# Altium PCB uku20710_proc.PcbDoc (part 3 of 3)
Units mm, origin at the board's own origin, x right, y up, seen from the top; angles counter-clockwise.
Board outline 354.7 x 156.7 mm, 4 copper layers (Top Layer, MidLayer1, MidLayer2, Bottom Layer); 286 components, 533 nets, 991 pads, 570 vias.
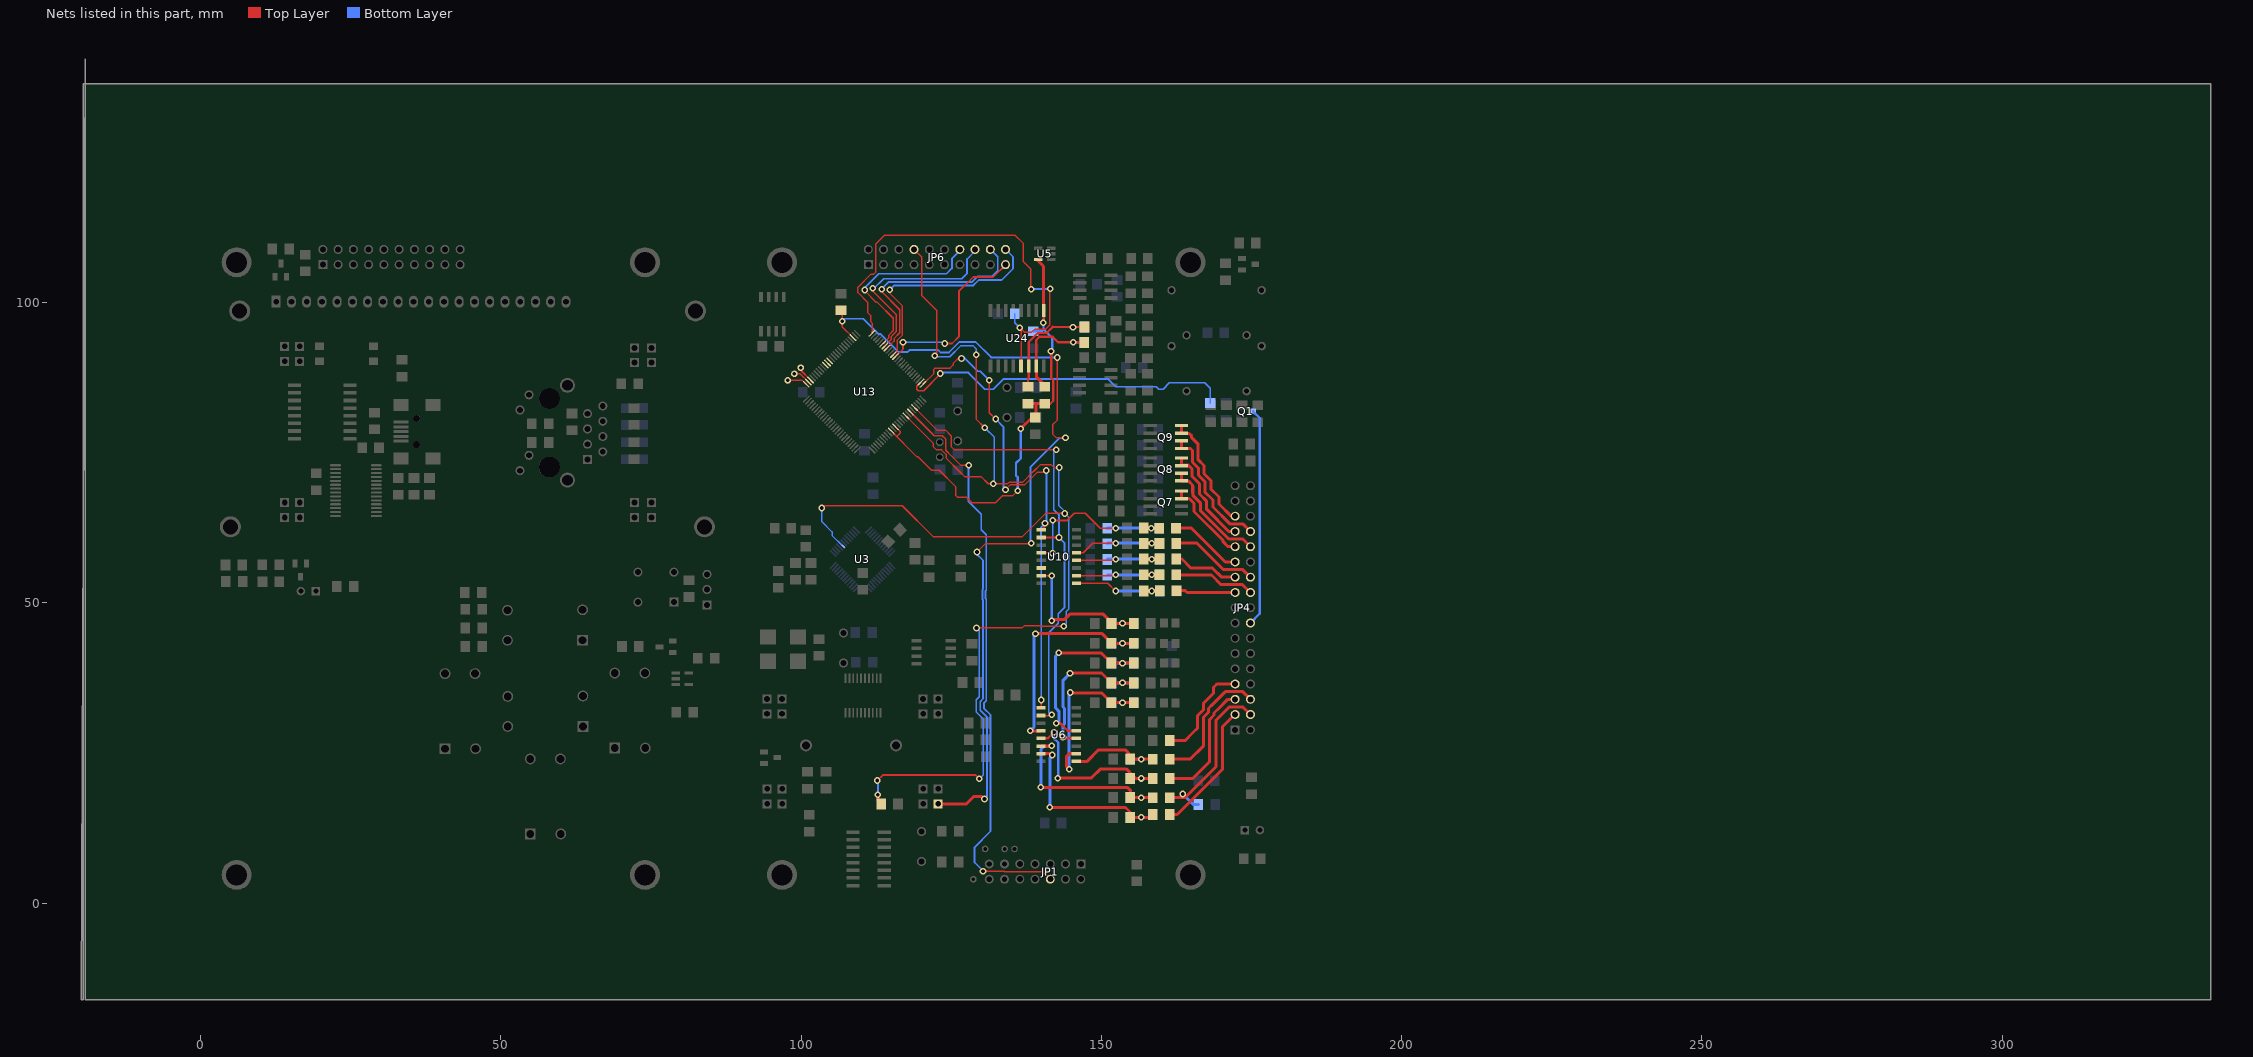
[diagram p3: the nets of this part, all layers, seen from the top]

## Via types
v1: diameter 1.1, hole 0.6, Top Layer to Bottom Layer, 491 vias
v2: diameter 1.2, hole 0.7, Top Layer to Bottom Layer, 63 vias
v3: diameter 1.5, hole 1, Top Layer to Bottom Layer, 12 vias
v4: diameter 1.27, hole 0.7, Top Layer to Bottom Layer, 3 vias
v5: diameter 1.2, hole 0.6, Top Layer to Bottom Layer, 1 vias

## Nets (pads, with @x,y where several pads share a name; then routed paths per layer and width w, separated by ;. In a path a pad name is that pad's centre, name@x,y a point inside that pad or via, vN(x,y) a via of type N, cw(c..) or ccw(c..) an arc to the next point about the centre after c; other vN are vias at no path point) (continued)
P1_25: JP6.19 U13.39 | length 29.9
  Top Layer w0.3: U13.39@115.701,90.985 116.974,92.258 v1(116.952,93.374) ; v1(123.904,93.173) 125.124,93.173 126.274,94.324 126.274,101.851 128.674,104.251 131.984,104.251 JP6.19@134.034,106.301
  Bottom Layer w0.3: v1(116.952,93.374) 123.704,93.374 v1(123.904,93.173)
P1_26: JP6.20 U13.40 | length 38
  Top Layer w0.25: v1(114.774,102.151) 114.774,101.501 116.874,99.401 116.874,94.601 116.024,93.751 116.024,92.015 U13.40@115.347,91.338
  Bottom Layer w0.3: v1(114.774,102.151) 115.474,102.851 128.674,102.851 129.574,103.751 133.374,103.751 135.274,105.651 135.274,107.601 JP6.20@134.034,108.841
P1_27: JP6.18 U13.43 | length 36.9
  Top Layer w0.25: v1@113.324,101.901 116.424,98.801 116.424,94.951 115.474,94.001 115.474,93.587 U13.43@114.287,92.399 ; U13.43@114.124,92.251 U13.43@114.28,92.406
  Bottom Layer w0.3: v1@113.324,101.901 113.324,102.177 113.324,102.201 113.351,102.228 114.524,103.401 128.424,103.401 129.374,104.351 131.774,104.351 132.724,105.301 132.724,107.611 JP6.18@131.494,108.841
  other v1: 113.403,102.177
P1_28: JP6.16 U13.44 | length 33.2
  Top Layer w0.25: v1@111.874,102.101 111.874,101.951 115.874,97.951 115.874,95.201 115.804,95.131 115.804,95.123 115.002,94.32 115.002,93.821 U13.44@113.933,92.753
  Bottom Layer w0.3: v1@111.874,102.101 112.05,102.277 113.724,103.951 126.724,103.951 127.624,104.851 127.624,107.251 128.954,108.581 JP6.16@128.954,108.841
  other v1: 111.951,102.376
P1_29: 
P1_29: 
P1_29: 
P1_29: 
P1_29: JP6.14 U13.45 | length 31.9
  Top Layer w0.25: v1@110.3,102.376 110.3,102.226 110.526,102.001 112.501,100.025 112.701,100.025 115.352,97.375 115.352,95.324 114.552,94.524 114.552,94.078 U13.45@113.58,93.106
  Bottom Layer w0.3: v1@110.501,102.376 112.901,104.776 124.204,104.776 125.104,105.677 125.104,107.277 126.414,108.587 JP6.14@126.414,108.841
  other v1: 110.601,102.076
P1_30: U6.10 U10.10 U13.21 | length 78.8
  Top Layer w0.25: U13.21@118.883,82.5 122.631,78.751 124.024,78.751 124.974,77.801 124.974,76.001 125.474,75.501 v1(142.474,75.501) ; U6.10@139.954,31.219 139.972,31.201 141.702,31.201 v1@141.76,31.259
  Top Layer w0.3: U10.10@139.999,60.876 v1@142.95,60.876
  Bottom Layer w0.3: v1@141.76,31.259 141.224,31.794 141.224,44.977 142.81,46.563 142.81,48.199 143.874,49.263 143.874,59.902 v1@142.96,60.816 ; v1(142.474,75.501) 142.074,75.101 142.074,65.503 142.924,64.653 v1@142.924,60.816
  other v1: 141.76,31.359 142.935,60.876
P1_31: R22.1 U13.20 | length 108.1
  Top Layer w0.25: U13.20@118.529,82.146 122.405,78.271 123.755,78.271 124.505,77.521 124.505,75.77 125.557,74.719 127.832,74.719 v1(128.032,74.519)
  Top Layer w0.3: R22.1@104.133,19.043 109.666,19.043 112.578,21.956 131.883,21.956 133.457,20.382 v1(135.934,20.382) ; v1(131.357,32.909) 133.358,30.909 v1(136.508,30.909)
  Bottom Layer w0.3: v1(128.032,74.519) 128.882,73.669 128.882,72.444 128.406,71.968 128.406,67.218 130.657,64.967 130.657,62.517 131.357,61.817 131.357,51.964 131.157,51.764 131.157,50.914 131.357,50.714 v1(131.357,32.909) ; v1(135.934,20.382) 136.558,21.006 136.558,22.707 135.958,23.307 135.958,30.359 v1(136.508,30.909)
P1_31: 
P1_31: 
P1_31: 
P1_31: 
P1_31: 
P1_31: 
P1_31: 
P1_31: 
P1_31: 
P1_31: 
P1_31: 
P1_31: 
P1_31: 
P2_0: U13.75 X13.1 | length 3.3
  Top Layer w0.25: X13.1@97.772,87.022 100.218,87.022 U13.75@100.852,86.389
P2_1: U13.74 X14.1 | length 2.9
  Top Layer w0.25: X14.1@98.872,88.122 99.825,88.122 U13.74@101.205,86.742
P2_2: U13.73 X15.1 | length 2.7
  Top Layer w0.25: X15.1@99.925,89.151 99.925,88.729 U13.73@101.559,87.096
P2_7: U13.66
P2_8: U13.65
P2_9: U13.64
P2_10: R9.2 U13.53 X20.1 | length 142.3
  Top Layer w0.25: R9.2@106.7,98.725 106.874,98.55 v1(106.874,96.901) 106.824,96.851 106.824,95.972 U13.53@108.63,94.167 ; v1(129.274,58.451) 130.624,59.801 v1@138.274,59.801 ; v1(142.674,90.851) 142.674,80.451 141.874,79.651 141.874,78.101 142.524,77.451 v1(144.024,77.451)
  Top Layer w0.5: X20.1@122.822,16.501 127.502,16.501 128.706,17.706 130.107,17.706 v2(130.507,17.305)
  Bottom Layer w0.3: v1(106.874,96.901) 107.274,97.301 110.324,97.301 112.851,94.774 113.201,94.774 116.202,91.773 117.752,91.773 118.052,92.073 122.804,92.073 123.204,91.673 124.604,91.673 126.355,93.424 129.055,93.424 131.628,90.851 v1(142.674,90.851) ; v1(129.274,58.451) 129.274,58.051 130.274,57.051 130.274,52.239 130.197,52.162 130.197,50.516 130.274,50.439 130.274,34.001 129.824,33.551 129.824,32.101 130.924,31.001 130.924,17.723 v2(130.507,17.305) ; v1@138.274,59.801 138.174,59.901 138.174,72.551 143.074,77.451 v1(144.024,77.451)
  other v1: 138.309,59.916
P2_13: R97.1 U13.50 U24.5 | length 74.9
  Top Layer w0.25: U13.50@111.812,94.874 111.812,96.566 111.552,96.825 111.552,97.848 111.124,98.276 111.124,99.977 109.452,101.649 109.452,102.551 111.628,104.727 112.102,104.727 112.452,105.078 112.452,109.779 113.853,111.179 135.658,111.179 137.008,109.829 137.008,106.778 138.259,105.528 v1@138.259,102.277 ; v1(136.408,95.825) v1@136.609,95.624 ; U24.5@136.609,89.426 v1@136.609,95.624 ; v1(141.46,102.277) 141.36,102.177 141.36,96.225 140.659,95.525 138.859,95.525 138.409,95.075 137.159,95.075 v1@136.609,95.624
  Bottom Layer w0.3: R97.1@135.57,98.119 135.57,96.663 v1(136.408,95.825) ; v1(138.309,102.227) v1@141.41,102.227
P3_25: R84.1 U13.27 | length 57.5
  Top Layer w0.25: U13.27@119.944,86.742 119.254,86.053 119.254,85.573 119.504,85.323 120.404,85.323 123.155,88.073 v1(123.155,88.173)
  Bottom Layer w0.3: v1(123.155,88.173) 123.305,88.323 127.856,88.323 130.607,85.573 132.007,85.573 133.708,87.273 151.062,87.273 152.362,85.973 159.164,85.973 159.564,85.573 160.264,85.573 161.315,86.623 167.216,86.623 168.113,85.726 R84.1@168.113,83.269
P3_26: U6.9 U10.9 U13.26 | length 84.3
  Top Layer w0.25: U13.26@120.297,86.389 122.103,88.195 122.103,88.922 122.253,89.072 124.804,89.072 125.304,89.573 125.304,89.823 126.355,90.873 126.705,90.873 v1@126.905,90.873 ; v1(131.324,87.051) 131.324,81.651 v1(132.374,80.601) ; v1@133.89,68.851 v1(134.024,68.851) 134.791,69.618 137.185,69.618 139.335,71.768 v1@140.835,71.768 ; U6.9@139.954,32.489 139.954,33.481 v1@139.974,33.501 ; U10.9@139.999,62.146 140.609,62.756 v1(140.609,63.217)
  Bottom Layer w0.3: v1@126.905,90.873 127.053,90.873 129.374,88.551 129.824,88.551 v1(131.324,87.051) ; v1(132.374,80.601) 133.674,79.301 133.674,69.051 133.949,68.776 v1@134.074,68.651 ; 139.959,61.317 139.959,62.567 140.835,63.443 v1@140.835,71.768 ; v1@139.974,33.501 139.974,33.81 139.974,61.901
  other v1: 140.009,33.81 140.835,72.018 126.705,90.673
PB1: 
PB1: 
PB2: 
PB2: 
PB3: 
PB3: 
PE6: 
PE6: 
PE7: 
PQ3: 
PQ4: 
PQ5: 
PQ6: 
PROG0: 
PROG1: 
PROG1: 
PROG1: 
PWM1: 
PWM2: 
REL1: JP4.24 Q7.5 Q7.6 | length 17.1
  Top Layer w0.5: Q7.6@163.336,66.071 Q7.5@163.336,64.801 163.336,64.789 Q7.5@164.236,64.789 ; Q7.5@163.824,64.901 163.824,64.851 164.624,64.851 169.374,60.101 169.374,59.251 170.574,58.051 173.554,58.051 JP4.24@174.814,56.791
REL1: 
REL2: JP4.25 Q7.7 Q7.8 | length 14.4
  Top Layer w0.5: Q7.8@163.336,68.611 Q7.7@163.336,67.341 163.348,67.351 164.624,67.351 165.424,66.551 165.424,65.201 170.274,60.351 170.274,60.151 171.094,59.331 JP4.25@172.274,59.331
REL3: JP4.26 Q8.5 Q8.6 | length 20.1
  Top Layer w0.5: Q8.6@163.324,71.566 Q8.5@163.324,70.296 163.327,70.299 163.374,70.251 164.524,70.251 165.174,69.601 165.174,68.301 ; 165.224,69.401 165.224,67.901 166.474,66.651 166.474,65.351 171.224,60.601 173.544,60.601 JP4.26@174.814,59.331
REL4: JP4.27 Q8.7 Q8.8 | length 17.3
  Top Layer w0.5: Q8.8@163.324,74.106 Q8.7@163.324,72.836 163.389,72.901 164.474,72.901 165.074,72.301 165.074,71.051 166.324,69.801 166.324,68.101 167.524,66.901 167.524,65.551 171.204,61.871 JP4.27@172.274,61.871
REL5: JP4.28 Q9.5 Q9.6 | length 22
  Top Layer w0.5: Q9.5@163.324,75.696 Q9.5@163.324,75.701 ; Q9.6@163.324,76.966 Q9.5@163.324,75.701 ; JP4.28@174.814,61.871 173.534,63.151 171.374,63.151 168.574,65.951 168.574,67.101 167.224,68.451 167.224,70.201 166.174,71.251 166.174,72.401 165.174,73.401 165.174,75.351 164.824,75.701 Q9.5@163.324,75.701
REL6: JP4.29 Q9.7 Q9.8 | length 20
  Top Layer w0.5: Q9.8@163.324,79.506 Q9.7@163.324,78.236 163.317,78.244 163.274,78.201 163.324,78.201 164.624,78.201 165.024,77.801 165.024,77.501 166.124,76.401 166.124,73.801 167.074,72.851 167.074,71.501 168.224,70.351 168.224,68.951 169.574,67.601 169.574,66.451 171.614,64.411 JP4.29@172.274,64.411
REL7: JP4.16 Q1.3 | length 36.3
  Bottom Layer w0.4: JP4.16@174.814,46.631 176.368,48.185 176.368,80.771 Q1.3@175.268,81.872
RES: D1.1 JP6.8 U3.29 U13.17 | length 225.8
  Top Layer w0.25: v1(103.452,65.787) 103.852,66.187 ; v1@103.814,66.149 116.822,66.149 121.955,61.016 136.84,61.016 140.691,64.867 v1@143.96,64.867 ; U13.17@117.469,81.085 122.024,76.53 122.024,75.951 122.524,75.451 123.374,75.451 124.124,74.701 124.124,74.101 126.337,71.889 127.207,71.019 129.939,71.019 131.14,69.819 v1(131.957,69.819) ; JP6.8@118.794,108.841 120.074,107.561 120.074,101.151 122.574,98.651 v1@122.574,91.251 ; v1(129.124,91.301) 129.124,80.601 v1(130.574,79.151) ; v2(129.207,45.801) v2@129.307,45.801 ; v2@129.318,45.813 130.407,45.813 ; 130.407,45.801 136.774,45.801 137.174,46.201 139.824,46.201 139.974,46.051 v1@143.76,46.051 ; v1@131.774,69.801 134.366,69.801 134.613,70.048 136.856,70.048 138.731,71.922 ; 138.735,71.918 139.834,73.018 141.587,73.018 142.085,72.519 v1(143.01,72.519)
  Top Layer w0.3: v1(112.678,20.405) 113.579,21.305 129.083,21.305 v1(129.683,20.705)
  Top Layer w0.5: v1(112.778,18.055) 112.778,17.068 D1.1@113.334,16.513
  Bottom Layer w0.25: v1(103.452,65.787) 103.452,63.487 105.152,61.787 105.152,61.224 U3.29@106.731,59.646 ; v1(122.253,91.123) 122.404,90.973 124.754,90.973 126.605,92.823 128.605,92.823 129.124,92.304 v1(129.124,91.301) v1@129.074,91.251 ; v2(129.207,45.801) 129.657,45.351 129.657,34.36 129.157,33.86 129.157,31.809 130.307,30.659 130.307,21.805 130.307,21.329 v1(129.683,20.705) ; v1(130.574,79.151) 132.174,77.551 132.174,69.951 v1@132.024,69.801 ; 142.924,66.168 142.924,72.434 v1(143.01,72.519) ; 142.96,66.168 143.924,65.203 v1(143.924,64.867) 144.524,64.267 144.524,48.927 144.11,48.513 144.11,46.413 v1(143.76,46.063)
  Bottom Layer w0.3: v1(112.678,20.405) 112.778,20.305 v1(112.778,18.055)
RX: 
RXCAN: 
SK1: JP4.23 R43.1 | length 12.2
  Top Layer w0.5: R43.1@162.434,62.417 R43.1@162.427,62.423 165.009,62.423 170.641,56.791 JP4.23@172.274,56.791
SK2: JP4.22 R45.1 | length 14.7
  Top Layer w0.5: R45.1@162.465,59.916 165.916,59.916 170.317,55.515 173.551,55.515 JP4.22@174.814,54.251
SK3: JP4.21 R49.1 | length 11
  Top Layer w0.5: R49.1@162.477,57.272 163.409,57.272 164.916,55.765 168.516,55.765 170.03,54.251 JP4.21@172.274,54.251
SK4: JP4.20 R51.1 | length 13.6
  Top Layer w0.5: R51.1@162.465,54.615 168.316,54.615 169.917,53.014 173.511,53.014 JP4.20@174.814,51.711
T3: 
T3: 
TD1: 
TX: 
U2: U10.14
U5: 
U6: 
U7: 
U8: 
UAKB: 
UB1: JP4.3 R25.2 | length 21.9
  Top Layer w0.5: R25.2@161.362,14.747 162.62,14.747 170.124,22.251 170.124,29.301 172.214,31.391 JP4.3@172.274,31.391
UB2: JP4.5 R29.2 | length 20.7
  Top Layer w0.5: R29.2@161.362,20.745 165.218,20.745 168.024,23.551 168.024,30.567 168.766,31.309 168.766,31.659 169.317,32.209 ; 169.325,32.201 171.054,33.931 JP4.5@172.274,33.931
UBM1: JP4.4 R27.2 R102.1 | length 28.8
  Top Layer w0.5: R27.2@161.362,17.545 163.918,17.545 164.035,17.661 169.074,22.701 169.074,30.451 171.274,32.651 173.554,32.651 JP4.4@174.814,31.391 ; v1(163.541,18.155) 164.041,17.654
  Bottom Layer w0.5: v1(163.541,18.155) 165.285,16.411 R102.1@166.13,16.411
UBM2: JP4.6 R33.2 | length 21.8
  Top Layer w0.5: R33.2@161.362,23.945 164.768,23.945 167.024,26.201 167.024,30.967 167.816,31.759 167.816,32.409 168.266,32.859 ; 168.274,32.851 170.624,35.201 173.544,35.201 JP4.6@174.814,33.931
UIB1: C65.2 R122.2 R126.1 U24.7 | length 19
  Top Layer w0.4: U24.7@139.149,89.272 U24.7@139.149,89.426 139.149,93.765 139.658,94.274 141.908,94.274 142.824,93.358 v1(145.311,93.358) R122.2@147.137,93.358
  Top Layer w0.5: U24.7@139.149,89.426 139.149,87.626 140.568,86.208 R126.1@140.568,85.964
  Bottom Layer w0.4: v1(145.311,93.358) 145.327,93.375 147.172,93.375 C65.2@147.211,93.375
UIB2: C16.2 R62.2 R66.1 U24.6 | length 21
  Top Layer w0.4: R66.1@137.768,85.964 137.768,87.395 137.879,87.506 U24.6@137.879,89.426 137.879,93.396 139.408,94.924 140.858,94.924 141.408,95.474 ; 141.428,95.455 141.924,95.951 145.261,95.925 147.187,95.904 147.771,95.904 R62.2@147.824,95.851
  Bottom Layer w0.4: v1@145.261,95.925 C16.2@147.122,95.904 C16.2@147.722,95.904
  other v1: 145.261,95.875
ULOAD: JP4.19 R36.2 | length 9.9
  Top Layer w0.5: R36.2@162.502,52.008 163.972,52.008 164.268,51.711 JP4.19@172.274,51.711
US: JP4.7 R41.2 | length 17.3
  Top Layer w0.5: R41.2@161.362,27.045 163.918,27.045 165.253,28.379 166.024,29.151 166.024,31.218 166.966,32.159 166.966,33.209 168.666,34.91 168.666,35.91 168.992,36.235 169.228,36.471 JP4.7@172.274,36.471 ; 168.967,36.26 168.972,36.255 168.972,36.215
US1: 
US1: 
US1: 
US1: 
US1: 
US1: 
US1: 
US1: 
US1: 
UU1: C4.1 R24.1 R25.1 U6.15 | length 31.9
  Top Layer w0.5: U6.15@139.954,24.869 139.924,24.901 139.954,24.901 141.566,24.901 v1(141.81,24.657) ; v1(141.424,15.951) 141.474,15.901 154.017,15.901 154.763,15.155 154.763,14.258 154.763,14.245 154.787,14.245 156.663,14.245 v1@157.112,14.245 ; v1@156.363,14.205 156.663,14.205 158.02,14.205 R25.1@158.562,14.747
  Bottom Layer w0.4: C4.1@154.772,14.251 C4.1@155.374,14.251 ; C4.1@155.263,14.205 v1@156.36,14.205
  Bottom Layer w0.5: v1(141.424,15.951) 141.424,24.272 v1(141.81,24.657)
  other v1: 156.663,14.255
UU2: C5.1 R26.1 R27.1 U6.14 | length 33.6
  Top Layer w0.5: v1(139.924,19.251) 139.974,19.201 154.368,19.201 154.863,18.706 154.863,17.558 154.863,17.555 154.874,17.545 156.663,17.545 R27.1@158.562,17.545 ; 141.024,26.101 139.992,26.101 U6.14@139.954,26.139 141.641,26.139 v1(141.71,26.208)
  Bottom Layer w0.4: C5.1@154.772,17.553 155.272,17.553 C5.1@155.274,17.551
  Bottom Layer w0.5: v1(139.924,19.251) 139.924,25.601 140.424,26.101 141.603,26.101 v1(141.71,26.208) ; C5.1@154.863,17.553 155.272,17.553 156.661,17.553 v1(156.663,17.551)
UU3: C6.1 R28.1 R29.1 U6.13 | length 30
  Top Layer w0.4: U6.13@139.954,27.409 141.061,27.409 v1(142.11,28.458)
  Top Layer w0.5: v1(142.724,20.801) 148.324,20.801 149.874,22.351 154.118,22.351 155.249,21.22 155.725,20.745 v1(156.663,20.745) R29.1@158.562,20.745
  Bottom Layer w0.4: v1(142.11,28.458) 142.11,27.408 142.81,26.708 142.81,20.887 v1(142.724,20.801) ; C6.1@154.772,20.751 155.224,20.751 C6.1@155.23,20.756 ; C6.1@154.963,20.756 C6.1@155.23,20.756 ; C6.1@155.274,20.801 C6.1@155.23,20.756 ; v1@156.66,20.756 C6.1@155.23,20.756
  Bottom Layer w0.5: v1@142.674,20.851 v1(142.724,20.801)
UU4: C7.1 R32.1 R33.1 U6.1 | length 17.4
  Top Layer w0.5: U6.1@145.804,23.599 145.804,23.601 147.624,23.601 149.524,25.501 153.969,25.501 R32.1@154.813,24.657 ; R32.1@154.963,23.957 156.657,23.957 v1(156.663,23.951) ; R32.1@155.018,24.189 R32.1@155.107,24.101 ; v1@156.663,23.945 R33.1@158.562,23.945
  Bottom Layer w0.4: C7.1@154.772,23.951 C7.1@155.274,23.951 ; C7.1@154.787,23.958 156.657,23.958 v1(156.663,23.951) ; C7.1@155.213,23.957 v1@156.31,23.957
UU5: C9.1 D6.2 R47.2 R48.2 U6.2 | length 33
  Top Layer w0.5: v1(144.66,22.257) 144.21,22.707 144.21,24.437 144.624,24.851 144.642,24.869 U6.2@145.804,24.869 ; v1(144.824,35.051) 144.874,35.001 150.005,35.001 R48.2@151.662,33.345 151.675,33.358 v1(153.513,33.358) R47.2@155.37,33.36
  Bottom Layer w0.5: v1@144.624,22.257 144.624,34.851 v1(144.824,35.051) ; C9.1@151.675,33.351 151.681,33.358 v1(153.513,33.358) D6.2@155.37,33.36 154.37,33.36
UU6: C10.1 D7.2 R54.2 R55.2 U6.4 | length 29.6
  Top Layer w0.4: v5@143.61,27.658 143.61,27.608 143.809,27.409 U6.4@145.804,27.409
  Top Layer w0.5: v1(144.774,38.251) 144.824,38.301 150.005,38.301 R55.2@151.662,36.645 151.675,36.658 153.513,36.658 R54.2@155.37,36.66
  Bottom Layer w0.5: v5@143.624,27.658 143.624,29.609 143.86,29.844 143.86,32.409 143.624,32.645 143.624,37.101 v1(144.774,38.251) ; C10.1@151.662,36.645 151.672,36.645 151.675,36.645 151.774,36.651 v1(153.513,36.651) D7.2@155.37,36.66 154.37,36.66
  other v5: 143.56,27.658
UU7: C13.1 D8.2 R58.2 R59.2 U6.5 | length 34.1
  Top Layer w0.4: v1(142.51,29.959) 143.11,29.959 144.39,28.679 U6.5@145.804,28.679
  Top Layer w0.5: v1(142.874,41.651) 142.924,41.601 150.019,41.601 R59.2@151.669,39.951 ; 154.387,39.958 155.374,39.951 v1(153.513,39.951) R59.2@151.669,39.951 ; R59.2@151.669,39.951 R59.2@151.662,39.945 R59.2@151.669,39.951
  Bottom Layer w0.5: v1(142.51,29.959) 142.96,30.409 142.96,31.874 142.374,32.459 142.374,41.151 v1(142.874,41.651) ; C13.1@151.679,39.953 151.681,39.951 v1(153.513,39.951) D8.2@155.374,39.951
UU8: C24.1 D9.2 R68.2 R70.2 U6.12 | length 40.2
  Top Layer w0.5: v1(138.159,28.658) 139.926,28.658 U6.12@139.947,28.679 ; v1(139.024,44.851) 150.124,44.851 151.697,43.279 151.724,43.251 R70.2@151.679,43.253 ; U6.12@139.924,28.701 U6.12@139.947,28.679 ; U6.12@139.954,28.679 U6.12@139.947,28.679 ; R70.2@151.662,43.245 153.018,43.245 153.024,43.251 v1(153.513,43.251) 155.374,43.251 154.387,43.258
  Bottom Layer w0.5: v1(138.159,28.658) 138.774,29.274 138.774,44.601 v1(139.024,44.851) ; C24.1@151.679,43.253 151.681,43.251 v1(153.513,43.251) D9.2@155.363,43.262
UU9: C8.1 R35.1 R36.1 U10.1 | length 17.1
  Top Layer w0.25: U10.1@145.849,53.256 151.07,53.256 v1(152.362,51.964)
  Top Layer w0.5: R35.1@157.076,51.921 157.119,51.964 v1(158.414,51.964) 158.457,52.008 R36.1@159.702,52.008
  Bottom Layer w0.5: v1(152.362,51.964) 152.366,51.961 C8.1@159.717,51.961 ; v1@158.414,51.961 v1(158.414,51.964)
UU10: 
UU10: C40.1 D13.2 R51.2 R111.2 U10.2 | length 17.6
  Top Layer w0.3: U10.2@145.911,54.515 152.212,54.515 v1(152.362,54.665)
  Top Layer w0.5: D13.2@157.07,54.671 157.064,54.665 R51.2@159.614,54.665
  Bottom Layer w0.5: R111.2@151.012,54.665 C40.1@159.564,54.665
  other v1: 158.364,54.665
UU11: C38.1 D4.2 R49.2 R118.2 U10.4 | length 18
  Top Layer w0.3: U10.4@145.849,57.066 145.85,57.065 152.162,57.065 v1(152.362,57.265)
  Top Layer w0.5: D4.2@157.068,57.274 R49.2@159.705,57.274 ; v1(158.364,57.265) v1@158.364,57.274
  Bottom Layer w0.5: R118.2@150.962,57.222 151.005,57.265 C38.1@159.664,57.265
UU12: C39.1 D12.2 R45.2 R129.2 U10.5 | length 18.6
  Top Layer w0.3: U10.5@145.849,58.336 146.982,58.336 148.561,59.916 v1(152.362,59.916)
  Top Layer w0.5: D12.2@157.068,59.875 159.605,59.875 R45.2@159.664,59.816 ; v1@158.364,59.875 v1(158.364,59.916)
  Bottom Layer w0.5: R129.2@150.962,59.866 151.012,59.916 C39.1@159.664,59.916
UU13: C37.1 D3.2 R43.2 R128.2 U10.12 | length 29.9
  Top Layer w0.3: U10.12@139.999,58.336 141.789,58.336 v1(141.86,58.266) ; v1(141.91,63.717) 144.287,63.717 145.487,64.916 147.312,64.916 149.805,62.423 v1(152.362,62.423)
  Top Layer w0.5: D3.2@157.12,62.423 R43.2@159.627,62.423
  Bottom Layer w0.3: v1(141.86,58.266) 141.91,58.316 v1(141.91,63.717)
  Bottom Layer w0.5: R128.2@150.962,62.408 150.977,62.423 C37.1@159.007,62.423
  other v1: 158.314,62.423
UU14: C26.1 D10.2 R75.2 R76.2 U10.15 | length 27.7
  Top Layer w0.25: U10.15@139.999,54.526 141.698,54.526 v1(141.724,54.5)
  Top Layer w0.5: v1(141.724,47.001) 141.974,47.251 143.886,47.251 144.736,48.101 150.324,48.101 151.774,46.651 151.865,46.56 153.024,46.56 153.033,46.551 153.513,46.551 R75.2@155.37,46.56
  Bottom Layer w0.4: v1(141.724,47.001) v1(141.724,54.5)
  Bottom Layer w0.5: C26.1@151.675,46.551 151.683,46.56 v1(153.513,46.56) D10.2@155.37,46.56
VBAT: JP1.6 U13.19 | length 97.6
  Top Layer w0.25: U13.19@118.176,81.792 122.148,77.821 123.505,77.821 124.074,77.251 124.074,75.401 124.976,74.5 126.557,72.918 v1(127.932,72.918) ; v1(130.274,5.301) 133.809,5.301 133.908,5.202 140.24,5.202 JP1.6@141.481,3.961
  Bottom Layer w0.3: v1(127.932,72.918) 127.856,72.842 127.856,66.916 130.005,64.766 130.005,62.166 130.824,61.347 130.824,52.11 130.677,51.963 130.677,50.715 130.824,50.568 130.824,33.701 130.424,33.301 130.424,32.451 131.524,31.351 131.524,11.944 128.882,9.302 128.882,6.743 130.274,5.351 v1(130.274,5.301)
VREF: C20.2 C25.2 R66.2 R126.2 U5.5 U13.10 U13.12 U24.9 | length 77.6
  Top Layer w0.25: U13.10@114.994,78.61 119.308,74.297 119.493,74.297 121.721,72.069 123.006,72.069 125.724,69.351 125.724,67.901 126.024,67.601 127.474,67.601 128.424,66.651 132.374,66.651 133.574,67.851 135.274,67.851 v1(136.074,68.651) ; U13.12@115.701,79.318 116.524,78.494 116.524,78.301 115.924,77.701
  Top Layer w0.4: R66.2@137.724,83.151 137.737,83.164 R66.2@137.768,83.164 R66.2@137.774,83.164 ; U24.9@140.419,98.676 140.419,97.156 140.424,97.151 ; R126.2@140.624,83.151 141.474,83.151 141.974,83.651 141.974,87.051 141.674,87.351 141.674,91.874 v1@141.674,91.951
  Top Layer w0.5: v1(136.574,79.001) 138.427,80.854 C25.2@138.971,80.854 ; R66.2@137.774,83.101 137.802,83.129 137.837,83.164 139.024,83.164 ; C25.2@139.074,80.801 139.074,80.854 139.074,83.114 139.024,83.164 ; U5.5@139.249,107.151 139.366,107.034 140.374,106.026 140.374,98.676 140.374,98.651 140.394,98.651 U24.9@140.419,98.676 ; R126.2@140.568,83.164 139.024,83.164
  Bottom Layer w0.3: 140.324,97.251 140.424,97.151
  Bottom Layer w0.4: v1(136.074,68.651) 136.074,70.901 135.774,71.201 135.774,73.251 136.574,74.051 v1(136.574,79.001) ; C20.2@138.662,95.207 140.091,95.207 140.384,95.5 ; v1@140.359,96.625 140.359,96.601 140.359,95.525 140.384,95.5 ; 140.409,95.525 140.384,95.5 ; v1@140.424,96.601 140.424,97.151 ; v1@141.674,91.951 141.81,92.086 141.81,94.075 140.384,95.5
  other v1: 141.61,91.874 140.324,96.601
VS: JP4.8 R71.2 | length 19
  Top Layer w0.5: R71.2@161.362,30.145 163.868,30.145 166.17,32.447 166.17,34.014 167.466,35.31 167.466,36.96 168.257,37.751 173.534,37.751 JP4.8@174.814,36.471
VS: 
pads on no net: C1_1.1 C1_1.2 C2_1.1 C2_1.2 C3_1.1 C3_1.2 C4_1.1 C4_1.2 C5_1.1 C5_1.2 C22_1.1 C22_1.2 C302.1 C302.2 C303.1 C303.2 C304.1 C304.2 C310.1 C310.2 D1_1.1 D1_1.2 D3_1.1 D3_1.2 DS1.1 DS1.2 J1.0 J1.1 J1.2 J1.3 J1.4 J1.5 J1.6 J301.0 J301.1 J301.2 J301.3 J301.4 J301.5 J301.6 J301.7 J301.8 J301.9 J301.10 J301.11 J301.12 JP4.30 JP5.1 JP5.2 JP5.3 JP5.4 JP5.5 JP5.6 JP5.7 JP5.8 JP5.9 JP5.10 JP5.11 JP5.12 JP5.13 JP5.14 JP5.15 JP5.16 JP5.17 JP5.18 JP5.19 JP5.20 JP6.10 JP9.1 JP9.2 JP9.3 Q1_1.1 Q1_1.2 Q1_1.3 Q3.1 Q3.2 Q3.3 Q5.1 Q5.2 Q5.3 R1_1.1 R1_1.2 R2.1 R2.2 R3.1 R3.2 R4.1 R4.2 R5.1 R5.2 R6.1 R6.2 R7.1 R7.2 R8.1 R8.2 R9_1.1 R9_1.2 R10_1.1 R10_1.2 R11.1 R11.2 R12_1.1 R12_1.2 R13_1.1 R13_1.2 R21.1 R21.2 R301.1 R301.2 R302.1 R302.2 R303.1 R303.2 R304.1 R304.2 R305.1 R305.2 R306.1 R306.2 S1.1 S1.2 S2.1 S2.2 S3.1 S3.2 S4.1 S4.2 S5.1 S5.2 S6.1 S6.2 U1.7 U1.11 U1_1.1 U1_1.2 U1_1.3 U1_1.4 U1_1.5 U1_1.6 U1_1.7 U1_1.8 U1_1.9 U1_1.10 U1_1.11 U1_1.12 U1_1.13 U1_1.14 U1_1.15 U1_1.16 U1_1.17 U1_1.18 U1_1.19 U1_1.20 U2.1 U2.5 U2.8 U2_1.1 U2_1.2 U2_1.3 U2_1.4 U2_1.5 U2_1.6 U2_1.7 U2_1.8 U2_1.9 U2_1.10 U2_1.11 U2_1.12 U2_1.13 U2_1.14 U2_1.15 U2_1.16 U2_1.17 U2_1.18 U2_1.19 U2_1.20 U2_1.21 U2_1.22 U2_1.23 U2_1.24 U2_1.25 U2_1.26 U2_1.27 U2_1.28 U3.1 U3.5 U3.6 U3.8 U3.9 U3.10 U3.11 U3.12 U3.25 U3.33 U3.38 U3.42 U3.45 U3.46 U3_1.1 U3_1.2 U3_1.3 U3_1.4 U3_1.5 U3_1.6 U3_1.7 U3_1.8 U3_1.9 U3_1.10 U3_1.11 U3_1.12 U3_1.13 U3_1.14 U3_1.15 U3_1.16 U4.3 U4.4 U4.5 U4.6 U4.7 U4.11 U4.12 U4.13 U4.15 U4_1.1 U4_1.2 U4_1.3 U4_1.4 U4_1.5 U5.4 U5_1.1 U5_1.2 U5_1.3 U5_1.4 U9.1 U9.5 U9.8 U10.13 U11.5 U12.1 U13.1 U13.2 U13.3 U13.4 U13.5 U13.6 U13.14 U13.51 U13.52 U13.56 U13.67 U13.68 U13.69 U13.70 U13.82 U13.85 U13.100 U24.12 X1_1.1 X2_1.1 X3_1.1 X4_1.1 X5_1.1 X6_1.1 X7_1.1 X8_1.1 X301.1 X302.1 X303.1 X304.1 X305.1 X306.1 X307.1 X308.1
copper on no net: | length 2107.1
  Top Layer w0.25: 33.308,77.72 36.359,77.72 v2(37.659,76.419) ; 33.308,78.52 36.909,78.52 v2(37.409,78.02)
  Top Layer w0.3: v1@2.651,101.476 v1(2.598,101.476) 3.701,101.476 4.101,101.876 9.552,101.876 10.403,101.025 10.403,99.548 10.941,99.009 ; v2(3.351,95.324) 3.627,95.6 8,95.6 9.8,97.4 37.782,97.4 40.513,100.131 ; v1(3.751,100.275) 4.676,101.2 9.376,101.2 9.85,100.725 9.85,99.15 11,98 35.842,98 37.973,100.131 ; v2(4.051,58.115) 4.051,58.1 4.151,58 4.151,56.264 ; 4.114,56.4 4.15,56.364 ; 4.201,53.5 4.201,53.542 4.201,53.565 6.931,56.295 6.945,56.295 ; 10.5,99.45 11.35,98.6 33.902,98.6 35.433,100.131 ; 14,90.2 13.453,89.653 13.453,81.821 14.138,81.136 15.63,81.136 ; 14,92.7 15.227,91.473 18.557,91.473 19.807,90.223 ; v2(15.004,76.269) 15.63,76.896 15.63,77.326 16.748,77.326 17.104,76.969 18.305,76.969 19.055,77.72 19.055,83.721 17.83,84.946 15.63,84.946 ; 15.63,78.596 17.429,78.596 v2(17.905,78.12) ; 15.63,79.866 15.635,79.87 v2(17.955,79.87) ; 15.63,86.216 15.63,87.098 v2(15.854,87.322) 18.055,87.322 18.455,86.922 20.005,86.922 20.605,87.522 20.605,88.472 21.305,89.172 21.305,91.225 19.807,92.723 ; 15.654,82.371 v2(17.905,82.371) ; 16.5,90.2 18.578,88.122 v2(19.255,88.122) ; 19.255,71.568 20.255,71.568 20.875,70.948 23.437,70.948 23.906,71.418 25.006,71.418 26.107,70.318 26.107,67.167 27.525,65.748 29.261,65.748 ; 19.305,68.767 19.536,68.998 23.825,68.998 v2(24.356,68.467) ; 22.461,70.298 24.337,70.298 v2@24.356,70.318 ; 22.461,71.598 21.325,71.598 20.505,72.418 20.505,74.069 21.755,75.319 21.755,80.87 22.756,81.871 22.756,86.922 23.506,87.672 33.508,87.672 33.508,87.722 ; 22.461,72.248 21.475,72.248 21.055,72.668 21.055,73.819 22.456,75.219 22.456,79.92 23.671,81.136 24.88,81.136 ; 22.461,72.899 22.461,74.324 23.056,74.919 23.056,79.37 23.551,79.866 24.88,79.866 ; 24.88,77.326 28.301,77.326 29.707,75.919 ; 24.88,82.406 25.991,82.406 v2(27.207,83.621) ; 24.88,84.946 28.833,84.946 v2@28.857,84.921 ; v2(27.057,90.223) 28.807,90.223 ; v2@27.557,71.218 v2(27.607,71.218) ; v2@27.707,68.367 27.726,68.349 29.261,68.349 ; 28.807,92.723 32.809,92.723 33.515,92.017 33.515,90.46 ; 28.957,78.87 29.857,78.87 31.858,76.869 33.358,76.869 v2(33.358,76.269) ; 29.207,71.618 28.007,71.618 v2(27.607,71.218) ; 29.261,64.448 36.491,64.448 38.11,66.067 38.11,67.967 ; 29.261,65.098 34.291,65.098 35.509,66.317 35.509,67.917 ; 29.261,66.398 30.926,66.398 v2@31.258,66.067 ; 29.261,67.698 32.69,67.698 32.958,67.967 ; 29.261,70.948 27.876,70.948 v2(27.607,71.218) ; 29.695,75.812 30.823,74.684 31.058,74.449 31.058,67.717 ; v2@30.858,74.719 v2(31.258,75.119) ; 31.75,105.677 31.75,107.027 ; 32.902,70.78 32.908,70.786 v2(32.908,71.618) ; 34.25,105.477 34.25,106.969 34.259,106.977 ; 35.502,70.78 35.509,70.786 v2(35.509,71.618) ; 38.103,70.78 38.103,71.511 v2(38.11,71.518) ; v1(41.75,42.65) 41.807,42.707 44.063,42.707 ; v1(41.75,54) 64.4,54 67.1,56.7 81.7,56.7 v1(81.75,56.65) ; 43.348,51.7 44,51.7 ; 43.861,49.012 44.011,49.012 ; 43.925,45.826 43.944,45.807 43.95,45.8 ; v1(68.35,42.9) 68.4,42.85 70.05,42.85 71.9,44.7 74.55,44.7 76.35,42.9 76.35,42.652 76.35,42.6 ; v1(68.4,47.9) 86.15,47.9 ; 78.55,41.7 78.576,41.675 79.125,41.125 79.125,38.3 ; 78.6,43.65 78.626,43.625 78.7,43.55 v1(84.3,43.55) ; 78.602,41.702 78.649,41.702 ; v1@79.17,39.96 79.93,39.96 80.737,40.767 82.81,40.767 ; v1(81.15,34.75) 81.275,34.875 81.275,36.4 ; 81.25,38.35 81.275,38.325 81.275,38.3 82.25,38.3 83.25,37.3 83.25,34.65 82,33.4 82,31.757 82,31.75 82.003,31.747 82.8,30.95 82.893,30.858 v2(85.422,30.858) ; 85.171,47.9 86.122,47.9 v2(86.722,47.3)
  Top Layer w0.4: v2(2.401,50.163) 3.501,49.062 4.651,49.062 4.601,49.062 ; v2(3.901,50.163) 4.301,49.763 5.051,49.763 ; v2(4.051,51.763) 3.988,51.763 5.051,50.7 39.86,50.7 40.86,51.7 44,51.7 ; 4.351,49.062 34.698,49.062 37.953,45.807 44.063,45.807 ; 4.651,49.763 35.297,49.763 36.153,48.907 44.063,48.907 ; 7.006,53.542 10.224,53.542 10.253,53.513 10.253,56.464 ; v2(10.253,58.565) 10.262,58.556 10.262,56.329 ; 12.405,104.298 13.484,105.377 14.404,105.377 14.754,105.727 14.754,108.877 ; 14.754,107.877 17.204,107.877 17.354,108.027 ; 16.612,51.87 16.704,51.963 ; 16.648,54.319 16.681,54.287 16.681,51.94 ; 17.554,56.514 v2(17.554,58.6) ; 19.185,51.936 20.278,51.936 21.054,52.712 22.694,52.712 ; 25.494,52.712 38.659,52.712 41.11,55.164 64.216,55.164 66.652,57.6 80.635,57.6 80.9,57.865 v1(85.472,57.865) ; v1(31.75,103.45) 31.75,105.677 ; 31.75,107.027 31.75,107.54 33.05,108.84 ; v1(34.25,102.65) 34.25,105.477 ; 34.259,106.977 34.259,107.509 35.59,108.84 ; 43.19,108.84 43.21,108.84 ; 43.2,108.83 43.21,108.84 ; 43.688,46.062 43.925,45.826 ; 45.593,100.131 45.593,107.757 44.51,108.84 43.21,108.84 ; 48.133,100.131 48.133,107.833 v1(48.15,107.85) ; v1(50.45,106.2) 50.673,105.977 50.673,100.131 50.654,100.15 50.6,100.15 ; v1@58.293,109.728 v1@58.315,109.728 ; 71.018,91.223 73.469,91.223
  Top Layer w0.5: v2(10.053,109.9) 10.981,109.9 11.953,108.927 ; 11.953,108.777 11.953,107.777 13.233,106.498 13.355,106.498 ; 14.304,104.176 17.653,100.827 17.653,100.131 17.653,100.847 ; v2(16.997,109.828) 17.47,110.3 23.97,110.3 25.43,108.84 ; 17.404,105.177 18.181,104.4 19.2,104.4 20.99,104.4 22.89,106.3 ; 20.193,100.131 20.193,101.143 25.35,106.3 25.43,106.3 ; 22.733,100.131 22.733,100.933 27.97,106.17 27.97,106.3 ; 25.273,100.131 25.273,100.623 30.51,105.86 30.51,106.3 ; 32.893,100.131 33.05,100.288 33.05,106.3 ; 35.433,100.131 35.433,100.133 35.59,100.29 35.59,106.3 ; 37.973,100.131 38.13,100.288 38.13,106.3 ; 40.513,100.131 40.67,100.288 40.67,106.3 ; 43.053,100.131 43.21,100.288 43.21,106.3 ; 45.7,38.2 45.78,38.12 ; v1(46.85,40.85) 46.85,42.65 ; 46.863,45.807 53.144,45.807 v1(53.15,45.8) ; 46.863,48.907 47.019,48.75 51.1,48.75 63.52,48.75 63.6,48.83 ; 51.15,34.4 v1(53.45,34.4) 63.57,34.4 63.65,34.48 ; 53.169,72.006 53.169,66.311 55.064,64.416 ; 53.169,82.116 53.169,81.765 55.114,79.82 ; 54.689,74.546 54.689,76.242 55.157,76.709 ; 55.064,64.416 65.216,64.416 ; 57.957,79.809 56.367,78.22 52.863,78.22 v1(52.863,78.27) 51.913,79.22 51.913,88.422 53.914,90.423 56.364,92.873 68.617,92.873 70.268,91.223 71.018,91.223 ; 58.015,76.719 59.015,76.719 59.615,77.319 59.615,80.82 59.065,81.371 56.114,81.371 54.164,83.321 53.814,83.321 52.963,84.171 52.963,87.272 57.414,91.723 67.717,91.723 70.918,88.522 74.419,88.522 75.069,89.172 75.069,90.016 ; 61.816,78.72 64.65,78.72 65.689,77.681 66.969,77.681 68.279,77.681 68.767,78.17 v1(72.218,78.17) ; 61.816,81.52 63.716,83.421 66.969,83.421 ; 64.816,78.47 64.816,78.554 ; 65.216,64.416 66.117,65.316 66.117,69.217 ; 66.867,83.421 68.217,84.771 74.319,84.771 75.469,83.621 75.469,73.919 75.466,73.916 72.169,73.916 ; 66.969,82.761 66.969,83.523 ; v2(68.317,86.372) 69.968,86.372 ; v1(68.717,65.466) 73.819,65.466 75.069,64.216 ; v1(68.717,70.918) 69.618,71.818 70.418,71.818 72.342,73.743 72.468,73.869 72.518,73.869 ; v2(68.717,83.421) 69.468,82.671 69.468,74.519 66.067,71.118 66.067,69.067 72.768,69.067 75.069,66.767 75.069,66.716 ; 72.169,82.416 72.169,84.57 ; 72.218,79.72 72.218,79.616 72.218,76.716 72.218,76.569 72.268,76.519 ; 72.809,50.101 78.809,50.101 80.509,50.101 81.17,50.763 ; 72.918,84.771 72.918,86.472 ; 72.95,42.75 72.95,42.707 72.95,40.5 v1(73.05,40.4) ; 73.469,91.223 73.876,91.223 75.069,92.416 ; v1(80.57,48.862) 80.582,48.85 83.5,48.85 84.3,49.65 84.3,49.663 84.3,52.203 84.3,52.24 ; v1@80.72,55.714 80.77,55.659 81.938,54.363 81.938,53.805 ; 81.338,50.955 81.338,51.038 82.9,52.6 82.9,53.38 84.292,54.772 84.3,54.78
  Top Layer w0.6: 46.8,51.7 60.75,51.7 v1(61.05,52)
  Top Layer w1: 58.293,100.131 v1@58.293,107.9 ; 58.293,105.827 58.293,109.706 v1@58.315,109.728
  Bottom Layer w0.25: 2.298,61.566 2.298,98.825 ; 2.298,63.266 2.298,60.918 3.001,60.215 3.001,51.063 v2@3.951,50.113 ; 2.298,96.974 2.298,98.822 v1(3.751,100.275) ; v2(2.401,50.163) 1.8,50.763 1.8,99.075 2.598,99.872 v1(2.598,101.476) 2.598,100.072
  Bottom Layer w0.3: v2(3.351,95.324) 2.801,94.774 2.801,61.616 4.051,60.365 v2(4.051,51.763) ; v2(10.253,58.565) 17.519,58.565 v2(17.554,58.6) ; 13.081,109.828 v2(16.997,109.828) ; 14,64.2 14,75.266 v2(15.004,76.269) ; v2(15.854,87.322) 16.5,86.676 16.5,64.2 ; 16.5,92.7 17.955,91.246 17.955,82.421 v2(17.905,82.371) ; 16.504,78.62 17.404,78.62 v2(17.905,78.12) ; v2(17.955,79.87) 19.105,81.02 19.105,87.972 v2(19.255,88.122) ; v2(24.456,70.268) 24.456,81.671 26.407,83.621 v2(27.207,83.621) ; v2(27.057,90.223) 27.057,87.15 28.857,85.35 28.857,77.87 31.258,75.469 v2(31.258,75.119) ; v2@27.557,71.218 v2(27.607,71.218) ; 27.97,108.84 29.25,107.56 29.25,102.8 29.1,102.65 29.1,97.9 29.7,97.3 79.1,97.3 79.95,96.45 79.95,60.65 80.6,60 80.6,55.7 80.653,55.647 80.67,55.664 v1@80.72,55.714 ; v2(32.908,71.618) 32.908,71.718 33.358,72.168 v2(33.358,76.269) ; v2(35.509,71.618) 37.659,73.769 v2(37.659,76.419) ; v2(37.409,78.02) 37.609,78.02 38.71,76.919 38.71,75.869 38.11,75.269 v2(38.11,71.518) ; 38.13,108.84 39.4,107.57 39.4,105.65 40.15,104.9 49.15,104.9 v1(50.45,106.2) ; 40.6,108.85 40.61,108.84 40.67,108.84 41.933,107.577 47.877,107.577 v1(48.15,107.85) ; v1(41.75,42.65) v1(41.75,54) ; 43.15,106.35 43.2,106.3 43.21,106.3 48.65,106.3 49.85,107.5 51.15,107.5 51.9,106.75 64.8,106.75 70.8,100.75 79.4,100.75 80.75,102.1 84.897,102.1 ; v1(58.315,107.727) 64.716,107.727 71.043,101.4 74.919,101.4 ; v1(68.35,42.9) 68.4,42.95 v1(68.4,47.9) ; 71.1,101.4 79,101.4 80.3,102.7 85.422,102.7 ; 78.8,102.2 80.3,103.7 85.822,103.7 ; 79.734,103.133 78.626,102.026 71.468,102.026 64.766,108.727 49.112,108.727 48.74,109.1 43.47,109.1 ; 80.85,64.45 80.85,60.9 81.75,60 v1(81.75,56.65) ; 80.99,64.59 85.522,69.121 85.522,99.025 85.522,101.476 84.897,102.1 ; v1(81.15,34.75) 82.95,34.75 84.3,36.1 v1(84.3,43.55) ; 84.721,102.1 84.897,102.1 ; 84.771,103.7 85.798,103.7 87.022,102.476 87.022,47.612 86.722,47.312 v2(86.722,47.3) ; 84.921,102.7 85.572,102.7 86.1,102.171 86.1,57.843 86.1,49.262 ; v2(85.422,30.858) 87.072,32.508 87.072,44.911 ; 86.1,50.063 86.1,48.791 85.221,47.912 85.221,46.812 87.072,44.961 87.072,43.911 ; 43.47,109.1 43.21,108.84 43.47,109.1
  Bottom Layer w0.4: v1(31.75,103.45) 32.35,104.05 51.834,104.05 55.753,100.131 ; v1(34.25,102.65) 34.75,103.15 50.194,103.15 53.213,100.131 ; v2@67.967,86.472 67.967,84.171 v2(68.717,83.421)
  Bottom Layer w0.5: v2(10.053,109.9) 16.925,109.9 v2(16.997,109.828) ; 45.78,25.7 45.78,38.2 45.78,38.93 46.85,40 v1(46.85,40.85) ; v1(53.15,45.8) 53.45,45.5 v1(53.45,34.4) ; 53.169,72.006 53.169,75.525 55.114,77.47 55.114,82.621 54.689,83.045 54.689,84.626 ; 59.98,11.5 59.9,11.58 59.9,24 59.9,50.85 v1(61.05,52) ; 64.419,73.871 64.722,73.569 67.217,73.569 67.552,73.904 70.863,73.904 70.863,70.623 72.269,69.217 72.269,66.716 ; 66.969,75.141 67.147,75.319 72.118,75.319 73.469,73.969 73.469,73.928 73.469,68.567 73.619,68.417 73.619,65.566 72.269,64.216 ; 66.969,80.221 67.168,80.221 69.35,82.404 70.863,82.404 70.863,83.966 73.669,86.772 73.669,91.773 73.026,92.416 72.269,92.416 ; 67.817,73.869 67.819,73.866 ; v1(68.717,65.466) v1(68.717,70.918) ; 70.863,79.604 70.984,79.604 70.984,79.404 v1@72.193,78.195 ; 70.918,76.719 70.918,76.919 73.576,79.577 73.576,79.628 ; v1(72.218,78.17) 73.576,76.812 73.576,76.728 ; 72.269,90.016 70.261,90.016 62.916,82.671 62.916,77.914 64.419,76.411 65.567,77.558 65.567,78.22 66.267,78.92 67.667,78.92 68.817,80.07 68.817,80.37 69.417,80.97 72.118,80.97 73.576,82.428 ; v1(73.05,40.4) 74.05,39.4 74.05,38.3 74.05,25.8 ; v1(79.125,39.9) 79.125,47.417 v1(80.57,48.862)
  Bottom Layer w0.6: 22.89,108.84 24.278,110.228 57.815,110.228 v1@58.315,109.728 ; 54.9,11.5 54.9,24 54.9,24.005
  Bottom Layer w1: 15.113,100.131 15.113,100.713 16.75,102.35 19.4,102.35 22.89,105.84 22.89,106.3 22.89,108.84
  other v1: 70.518,50.463 68.017,52.913 35.509,55.4 30.55,55.414 20.45,55.464 25.506,55.5 80.72,55.614 50.45,56.614 60.45,56.614 55.514,56.664 40.51,56.7 45.511,56.764 28.007,57.9 48.062,57.9 58.015,57.9 23.006,57.965 33.008,57.965 38.01,57.965 43.011,57.965 53.013,57.965 63.016,57.965 8.102,58.665 8.002,62.966 83.021,69.768 83.021,74.8 83.021,79.9 83.021,84.9 83.05,89.923 5.501,90.473 8.002,92.9 83.021,94.8 70.518,99.025 75.519,99.025 66.017,99.9 63.166,102.3 56.214,102.8 60.35,104.726 53.55,104.876 83.021,105.427 80.47,107.977 85.472,107.977 67.667,108.5 58.293,109.678
  other v2: 31.097,66.317 27.557,68.367 28.857,84.971
  other v3: 89.924,6.801 89.924,8.801 53.5,61.785 55,61.785 36.5,61.8 38,61.8 36.5,95.065 38,95.065 53.5,95.065 55,95.065 89.874,103.251 89.874,105.251
  other v4: 26.657,73.018 35.759,74.119 26.997,78.77

## Polygon pours and split planes (outlines as drawn)
no net on Top Layer (hatched 90Degree grid 0.1 track 0.3, remove dead copper): 22.556,90.97 22.556,76.62 20.655,74.796 20.605,74.748 20.605,63.566 40.56,63.566 40.56,93.273 22.556,93.273
no net on Top Layer (hatched 90Degree grid 0.1 track 0.3, remove dead copper): 1.995,108.983 1.995,1.95 87.122,1.95 87.122,110.428 1.9,110.428 1.9,106.395
GND on Top Layer (hatched 90Degree grid 0.1 track 0.3, remove dead copper): 86.572,115.779 86.572,-3.001 183.596,-3.001 183.596,116.129 86.572,116.129 86.572,113.829 86.672,113.829
GND on Top Layer (hatched 90Degree grid 0.1 track 0.3, remove dead copper): 103.172,55.538 108.603,50.107 111.851,50.107 117.382,55.638 117.382,58.885 112.201,64.067 108.253,64.067 103.172,58.985
+3V3 on Top Layer (hatched 90Degree grid 0.1 track 0.3, remove dead copper): 103.652,58.587 103.652,55.737 108.802,50.587 111.652,50.587 116.902,55.837 116.902,58.687 112.002,63.587 108.452,63.587 103.652,58.787
NetU700_4 on Top Layer (hatched 90Degree grid 0.1 track 0.3, remove dead copper): 213.174,67.701 213.174,53.901 216.924,50.151 216.924,12.351 224.474,4.801 224.474,1.201 232.324,1.201 232.324,3.851 238.374,9.901 238.374,29.351 243.824,34.801 248.424,39.401 248.424,68.101 213.124,68.101 213.124,67.551
no net on Bottom Layer (hatched 90Degree grid 0.1 track 0.3, remove dead copper): 40.86,63.566 20.605,63.566 20.605,74.276 22.556,76.092 22.556,93.273 40.81,93.273 40.81,63.613
no net on Bottom Layer (hatched 90Degree grid 0.1 track 0.3, remove dead copper): 1.9,110.417 87.122,110.417 87.122,1.95 1.947,1.95 1.947,110.478
GND on Bottom Layer (hatched 90Degree grid 0.1 track 0.3, remove dead copper): 87.722,114.429 87.722,-1.75 182.596,-1.75 182.596,113.879 87.622,113.879 87.622,114.029
+3V3 on Bottom Layer (hatched 90Degree grid 0.1 track 0.3, remove dead copper): 108.824,73.551 112.324,73.551 122.324,83.551 122.324,86.701 112.274,96.751 108.974,96.751 99.024,86.801 99.024,83.201 108.624,73.601

## Keep-outs
Keep-Out Layer:
  circle w0.25: c12.674,121.301 r0
  circle w0.25: c12.674,121.301 r0
  circle w0.25: c12.674,121.301 r0
  circle w0.25: c12.674,121.301 r0
  circle w0.25: c12.674,121.301 r0
  circle w0.25: c12.674,121.301 r0
  circle w0.25: c12.674,121.301 r0
  circle w0.25: c12.674,121.301 r0
  lines w0.2: 40.81,62.8 40.86,62.85
  lines w0.25: 10.256,60.815 34.5,60.815 ; 10.3,60.8 10.3,95.55 ; 10.3,60.85 10.35,60.8 ; 10.3,95.4 10.3,96.05 ; 10.35,96.05 34.5,96.05 ; 12.3,62.9 12.3,64.15 ; 12.35,94.05 34.5,94.05 ; 12.353,94.024 12.3,93.971 12.3,81.671 13.253,80.717 13.253,69.12 12.3,68.167 12.3,62.8 34.5,62.8 ; 18,48 33.75,48 33.75,8.9 2.25,8.9 2.25,48 18.05,48 ; 34.5,60.82 ccw(c34.5,61.82) 34.5,62.82 ; 34.5,94.045 ccw(c34.5,95.045) 34.5,96.045 ; 40,60.8 51.5,60.8 ; 40,60.82 cw(c40,61.82) 40,62.82 ; 40,62.8 40.96,62.8 ; 40,94.045 cw(c40,95.045) 40,96.045 ; 40,94.05 41,94.05 ; 40,96.05 51.5,96.05 ; 40.96,62.816 40.96,94.05 ; 50.5,62.816 50.5,94.05 ; 50.516,62.8 51.5,62.8 ; 51.5,60.805 ccw(c51.5,61.805) 51.5,62.805 ; 51.5,94.045 ccw(c51.5,95.045) 51.5,96.045 ; 57,60.805 cw(c57,61.805) 57,62.805 ; 57,60.815 78.864,60.815 ; 57,62.8 76.5,62.8 76.5,94 ; 57,94.045 cw(c57,95.045) 57,96.045 ; 57,94.05 76.491,94.05 ; 57,96.05 78.849,96.05 ; 78.8,60.8 78.85,60.85 ; 78.85,60.8 78.85,96.05 ; 88.915,101.249 cw(c89.874,101.201) 90.833,101.254 ; 88.915,107.298 ccw(c89.874,107.351) 90.834,107.303 ; 88.965,4.799 cw(c89.924,4.751) 90.883,4.804 ; 88.965,10.848 ccw(c89.924,10.901) 90.883,10.853 ; 89,4.95 89,0 0,0 0,112.4 89,112.4 ; 89,10.7 89,101.5 ; 89.022,107.027 89.022,112.377 ; 90.824,5.001 90.824,0.001 179.824,0.001 179.824,5.001 ; 90.824,10.601 90.824,101.301 ; 90.824,107.021 90.824,112.451 179.824,112.451 ; 179.824,4.701 179.824,112.351 ; 179.824,10.701 179.824,101.501 ; 40.3,96.05 40.3,96.05 ; 41.961,96.05 41.961,96.05
  lines w0.254: 50.5,94.05 51.5,94.05

## Other copper
Top Layer:
  text "2071x" at 66.417,63.616 h0.6

## Silkscreen, mask and mechanical layers (free items; w line width, h text height)
Mechanical 1:
  lines w0.25: 146.524,2.861 148.364,4.701 164.824,4.701
Mechanical 3:
  lines w0.3: 157.39,18.805 164.942,18.805 ; 164.992,15.204 164.992,21.605

## Text inside footprints (layer, text, board x,y; h text height)
JP1: Top Overlay "10" at 134.877,4.469 h1 r180; Top Overlay "9" at 134.877,7.009 h1 r180; Top Overlay "1" at 148.593,7.009 h1 r180; Top Overlay "2" at 149.101,4.469 h1 r180
JP5: Top Overlay "20" at 44.734,108.332 h0.6; Top Overlay "19" at 44.734,105.792 h0.6; Top Overlay "1" at 17.81,105.792 h0.6; Top Overlay "2" at 17.81,108.332 h0.6
JP6: Top Overlay "20" at 135.558,108.333 h1; Top Overlay "19" at 135.558,105.793 h1; Top Overlay "1" at 108.634,105.793 h1; Top Overlay "2" at 108.634,108.333 h1